# Altium PCB ESC_Tester_PCB.PcbDoc
Units mm, origin at the board's own origin, x right, y up, seen from the top; angles counter-clockwise.
Board outline 84.58 x 60.2 mm, 2 copper layers (Top Layer, Bottom Layer); 38 components, 41 nets, 162 pads, 0 vias.
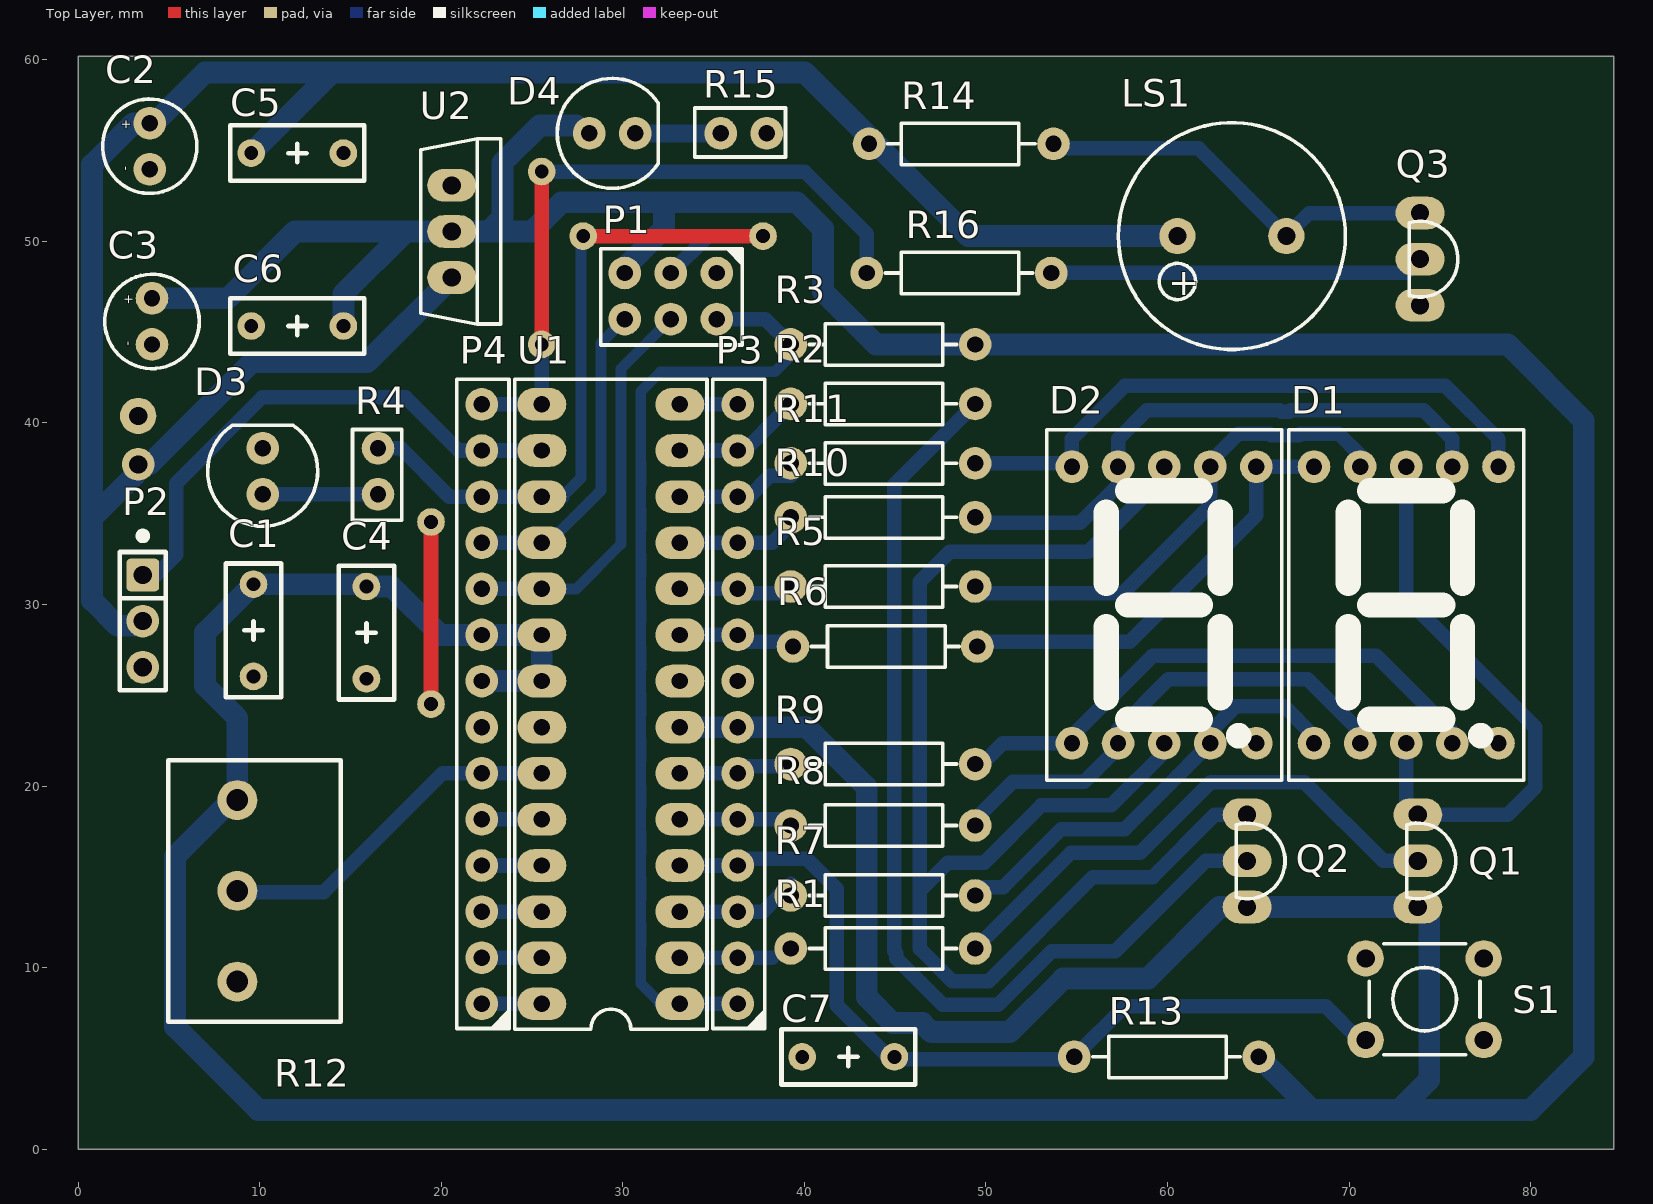
[diagram p0: Top Layer view]
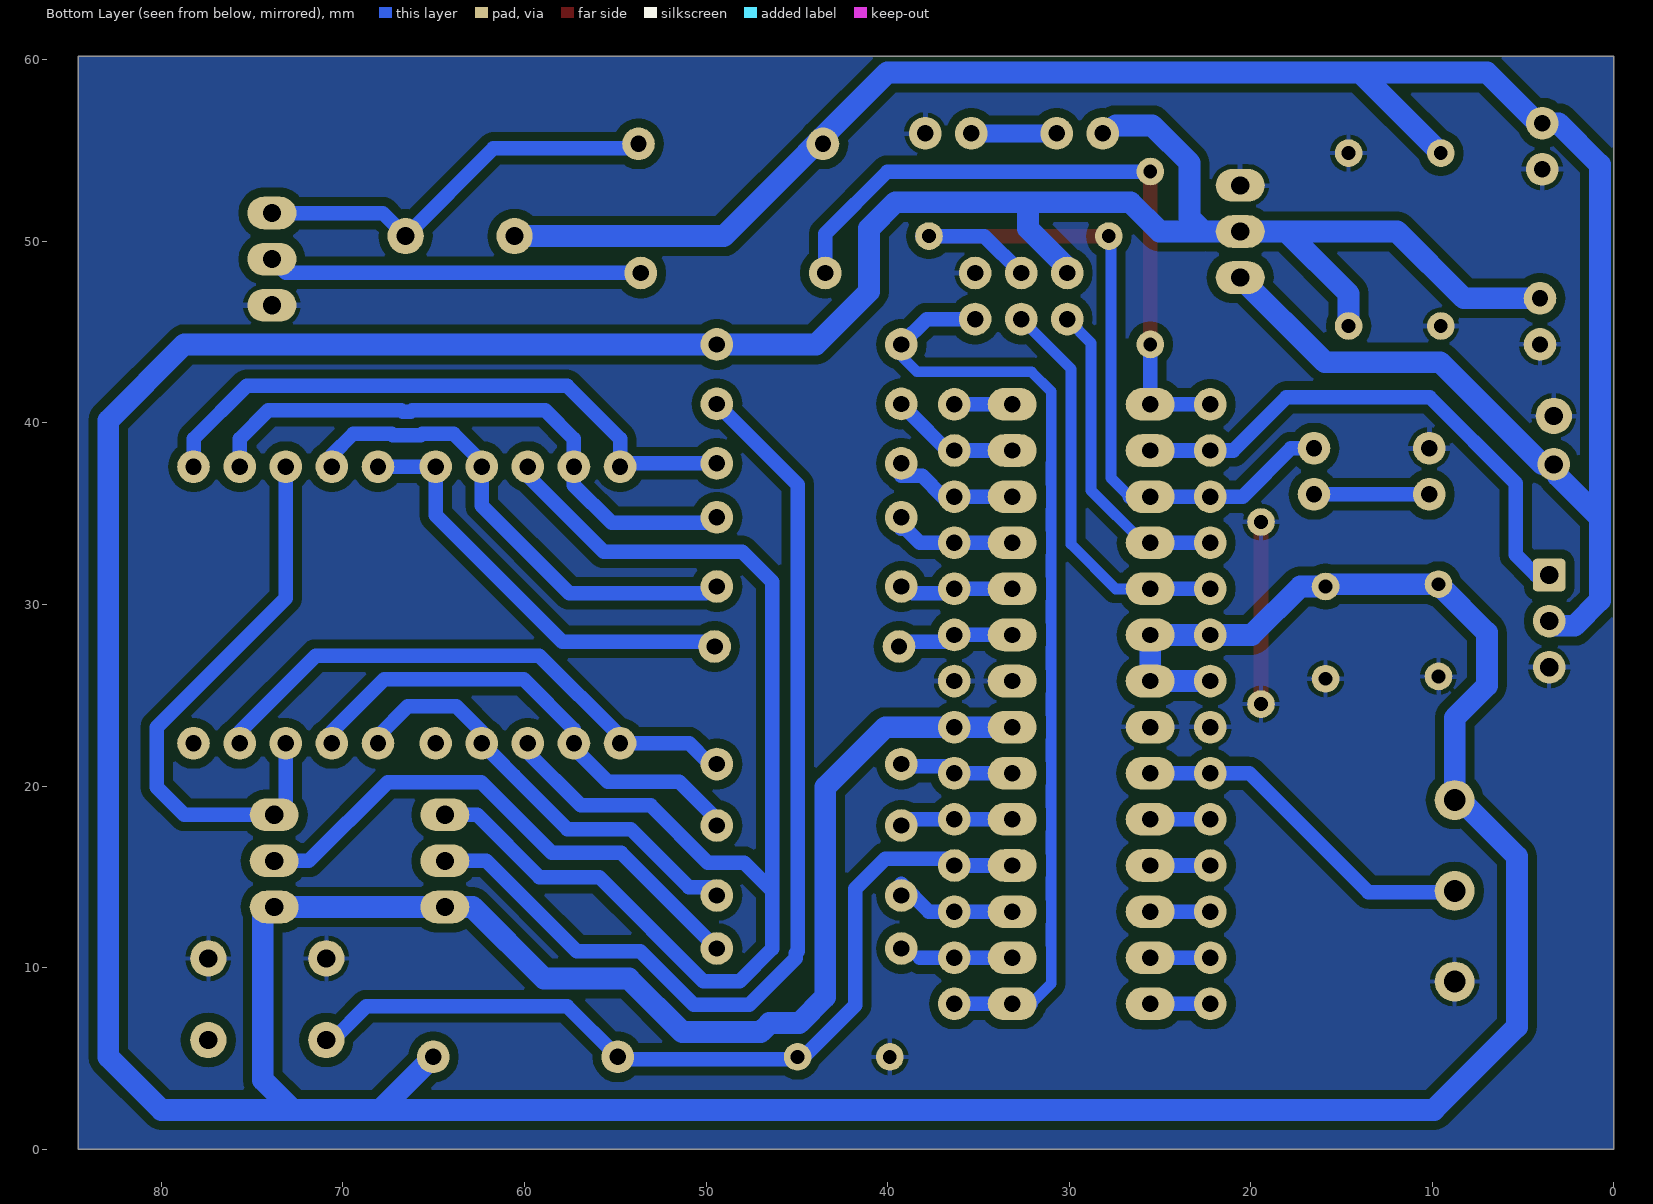
[diagram p1: Bottom Layer view, seen from below]

## Layer stack, top to bottom
Top Solder: solder mask 0.0102, Solder Resist, Dk 3.5
Top Layer: signal copper 0.0356
Dielectric 1: dielectric 0.32, FR-4, Dk 4.8
Bottom Layer: signal copper 0.0356
Bottom Solder: solder mask 0.0102, Solder Resist, Dk 3.5

## Board outline
0,0 84.582,0 84.582,60.198 0,60.198

## Design rules (kind name [scope] priority, off if disabled: settings)
Clearance [All] p1: gap=0.5 ignorepadtopadclearanceinfootprint=FALSE except(0: Arc-Text Arc-Hole Track-Text Track-Hole SMDPad-Text SMDPad-Hole THPad-Text THPad-Hole Via-Text Via-Hole Fill-Text Fill-Hole Poly-Text Poly-Hole Region-Text Region-Hole Text-Text Text-Hole)
ComponentClearance [All] p1: gap=0.3 collisioncheckmode=3 verticalgap=0.254 showdistances=FALSE
HoleSize [All] p1: absolutevalues=TRUE maxlimit=0.9 minlimit=0.9 maxpercent=80.000 minpercent=20.000
HoleToHoleClearance [All] p1: gap=0.1 allowstackedmicrovias=TRUE
MinimumSolderMaskSliver [All] p1: minsoldermaskwidth=0.05
PolygonConnect [All] p1: connectstyle=Relief reliefconductorwidth=0.254 reliefentries=4 polygonreliefangle="90 Angle" airgapwidth=0.254
RoutingVias [All] p1: holewidth=0.9 width=2 viastyle="Through Hole" minholewidth=0.9 minwidth=2 maxholewidth=0.9 maxwidth=2
SilkToSilkClearance [All] p1: silktosilkclearance=0
SilkToSolderMaskClearance [IsPad] p1: minsilkscreentomaskgap=0 clearancetoexposedcopper=TRUE
SolderMaskExpansion [All] p1: expansion=0.102
Width [All] p1: maxlimit=1.2 minlimit=0.5 preferedwidth=0.7 minimp=50.000000 maximp=50.000000 favimp=50.000000
24 further rules are at their usual default settings.

## Classes and differential pairs
net class DISP[6..0]: DISP0 DISP1 DISP2 DISP3 DISP4 DISP5 DISP6

## Components (designator, comment, footprint, x,y, rotation, side; value= is the part's Value field where it differs from the comment)
C1 "Cap Film 0.1uF" "Cap Film 0.1uF" 9.652,28.575 r270 top
C2 "10uF" "CAP RAD 10UF 35V" 3.937,55.241 r270 top
C3 "10uF" "CAP RAD 10UF 35V" 4.064,45.593 r270 top
C4 "Cap Film 0.1uF" "Cap Film 0.1uF" 15.875,28.448 r270 top
C5 "Cap Film 0.1uF" "Cap Film 0.1uF" 12.065,54.864 r0 top
C6 "Cap Film 0.1uF" "Cap Film 0.1uF" 12.065,45.339 r180 top
C7 "Cap Film 0.1uF" "Cap Film 0.1uF" 42.418,5.08 r180 top
D1 "7SEG RED CA 13MM" "7SEG RED PTH" 73.152,29.972 r0 top
D2 "7SEG RED CA 13MM" "7SEG RED PTH" 59.817,29.972 r0 top
D3 "LED 5MM RED" "LED 5MM RED" 10.16,37.338 r90 top
D4 "LED 5MM RED" "LED 5MM RED" 29.417,55.951 r0 top
LS1 "Buzzer" "BUZZER 12x6MM" 63.548,50.292 r0 top
P1 "87758-4016" "HDR MALE 2x3" 32.639,46.99 r180 top
P2 "920-0018-01" "HDR MALE 1x3" 3.556,31.623 r270 top
P3 "Header Female 1x14" "HDR FEMALE 1x14" 36.322,24.511 r90 top
P4 "Header Female 1x14" "HDR FEMALE 1x14" 22.225,24.511 r90 top
Q1 "BC327" TO92 73.787,15.875 r270 top
Q2 "BC327" TO92 64.389,15.875 r270 top
Q3 "BC549" TO92 73.914,49.022 r270 top
R1 "RES 1K 1/4W CARBON FILM" "RES 1K 1/4W CARBON FILM" 44.323,11.049 r0 top
R2 "RES 1K 1/4W CARBON FILM" "RES 1K 1/4W CARBON FILM" 44.323,41.046 r0 top
R3 "RES 10K 1/4W CARBON FILM" "RES 10K 1/4W CARBON FILM" 44.323,44.323 r0 top
R4 "RES 470R 1/4W CARBON FILM" "RES 470R 1/4W CARBON FILM_STAND" 16.51,37.338 r90 top
R5 "RES 470R 1/4W CARBON FILM" "RES 470R 1/4W CARBON FILM" 44.323,30.988 r0 top
R6 "RES 470R 1/4W CARBON FILM" "RES 470R 1/4W CARBON FILM" 44.45,27.686 r0 top
R7 "RES 470R 1/4W CARBON FILM" "RES 470R 1/4W CARBON FILM" 44.323,13.97 r0 top
R8 "RES 470R 1/4W CARBON FILM" "RES 470R 1/4W CARBON FILM" 44.323,17.822 r0 top
R9 "RES 470R 1/4W CARBON FILM" "RES 470R 1/4W CARBON FILM" 44.323,21.209 r0 top
R10 "RES 470R 1/4W CARBON FILM" "RES 470R 1/4W CARBON FILM" 44.323,34.798 r0 top
R11 "RES 470R 1/4W CARBON FILM" "RES 470R 1/4W CARBON FILM" 44.323,37.77 r0 top
R12 "Pot 10k" "Pot 10k" 8.763,14.224 r90 top
R13 "RES 10K 1/4W CARBON FILM" "RES 10K 1/4W CARBON FILM" 59.944,5.08 r0 top
R14 "RES 1K 1/4W CARBON FILM" "RES 1K 1/4W CARBON FILM" 48.641,55.372 r180 top
R15 "RES 470R 1/4W CARBON FILM" "RES 470R 1/4W CARBON FILM_STAND" 36.656,55.951 r0 top
R16 "RES 2K2 1/4W CARBON FILM" "RES 2K2 1/4W CARBON FILM" 48.514,48.26 r0 top
S1 "SPST-NO" "TACT SWITCH 6X6X7MM" 74.168,8.255 r180 top
U1 "ATMEGA8L" DIP28 29.337,24.511 r90 top
U2 "LM1117IMP-3.3/NOPB" TO220AB 20.574,50.546 r270 top

## Footprints (in the part's own frame and the unit in brackets; to place one, negate y for a bottom-side part, rotate by r counter-clockwise, add the part's x,y. Pads: shape width x height; smd on the part's side, far side on the other; paste and mask are expansions set on the pad)
"7SEG RED PTH" [mm]
  round 1.8 hole 0.9: 1(-5.08,-7.62) 2(-2.54,-7.62) 3(0,-7.62) 4(2.54,-7.62) 5(5.08,-7.62) 6(5.08,7.62) 7(2.54,7.62) 8(0,7.62) 9(-2.54,7.62) 10(-5.08,7.62)
  silkscreen extent -6.48,-9.65 6.48,9.65, body extent -6.38,-9.52 6.32,9.53, height 8.2
"BUZZER 12x6MM" [mm] "BUZZER 12x6MM"
  round 2 hole 1: 1(-3,0) 2(3,0)
  silkscreen extent -6.25,-6.25 6.25,6.25, body extent -6,-6 6,6, height 6.33
"Cap Film 0.1uF" [mil] "Cap Film 0.1uF"
  round 60 hole 30: 1(100,0) 2(-100,0)
  silkscreen extent -145,-60 145,60, body extent -145,-60 144,115, height 236
"CAP RAD 10UF 35V" [mm]
  round 1.8 hole 0.9: 1(-1.27,0) 2(1.27,0)
  silkscreen extent -2.6,-2.6 2.6,2.6, body extent -2.5,-2.5 2.5,2.5, height 12.2
DIP28 [mm]
  oval 1.8x2.7 hole 0.9: 1(-16.51,-3.8) 2(-13.97,-3.8) 3(-11.43,-3.8) 4(-8.89,-3.8) 5(-6.35,-3.8) 6(-3.81,-3.8) 7(-1.27,-3.8) 8(1.27,-3.8) 9(3.81,-3.8) 10(6.35,-3.8) 11(8.89,-3.8) 12(11.43,-3.8) 13(13.97,-3.8) 14(16.51,-3.8) 15(16.51,3.8) 16(13.97,3.8) 17(11.43,3.8) 18(8.89,3.8) 19(6.35,3.8) 20(3.81,3.8) 21(1.27,3.8) 22(-1.27,3.8) 23(-3.81,3.8) 24(-6.35,3.8) 25(-8.89,3.8) 26(-11.43,3.8) 27(-13.97,3.8) 28(-16.51,3.8)
  silkscreen extent -17.9,-5.3 17.9,5.3, body extent -17.79,-5.1 17.77,5.06, height 8
"HDR FEMALE 1x14" [mm] "Connector; Header; 14 Position"
  round 1.8 hole 0.9: 1(-16.51,0) 2(-13.97,0) 3(-11.43,0) 4(-8.89,0) 5(-6.35,0) 6(-3.81,0) 7(-1.27,0) 8(1.27,0) 9(3.81,0) 10(6.35,0) 11(8.89,0) 12(11.43,0) 13(13.97,0) 14(16.51,0)
  silkscreen extent -17.87,-1.5 17.9,1.37, body extent -17.8,-1.3 17.76,1.24, height 8.5
"HDR MALE 1x3" [mm] "PinHeader 1x3 TH Pitch 2.54mm"
  rrect25% 1.8x1.8 hole 1: 1(0,0)
  round 1.8 hole 1: 2(2.54,0) 3(5.08,0)
  silkscreen extent -2.3,-1.27 6.35,1.27, body extent -1.27,-1.27 6.35,1.27, height 9.5
"HDR MALE 2x3" [mm] "Connector; Header; 6 Position"
  round 1.8 hole 0.9: 1(-2.54,-1.27) 2(-2.54,1.27) 3(0,-1.27) 4(0,1.27) 5(2.54,-1.27) 6(2.54,1.27)
  silkscreen extent -3.94,-2.6 3.86,2.7, body extent -3.81,-2.54 3.81,2.54, height 5.94
"LED 5MM RED" [mm]
  round 1.8 hole 0.9: 1(-1.27,0) 2(1.27,0)
  silkscreen extent -3.03,-3.03 2.54,3.03, body extent -2.98,-3.01 2.44,3.01, height 9.31
"Pot 10k" [mm]
  round 2.2 hole 1.2: 1(-5,0) 2(0,0) 3(5,0)
  silkscreen extent -7.2,-5.7 7.2,3.8, body extent -8.15,-5.55 8.19,23.49, height 21.17
"RES 1K 1/4W CARBON FILM" [mm]
  round 1.8 hole 0.9: 1(-5.08,0) 2(5.08,0)
  silkscreen extent -4.06,-1.14 4.06,1.14, body extent -5.47,-1.27 5.47,1.27, height 3.27
"RES 2K2 1/4W CARBON FILM" [mm]
  round 1.8 hole 0.9: 1(-5.08,0) 2(5.08,0)
  silkscreen extent -4.06,-1.14 4.06,1.14, body extent -5.47,-1.27 5.47,1.27, height 3.27
"RES 10K 1/4W CARBON FILM" [mm]
  round 1.8 hole 0.9: 1(-5.08,0) 2(5.08,0)
  silkscreen extent -4.06,-1.14 4.06,1.14, body extent -5.47,-1.27 5.47,1.27, height 3.27
"RES 470R 1/4W CARBON FILM" [mm]
  round 1.8 hole 0.9: 1(-5.08,0) 2(5.08,0)
  silkscreen extent -4.06,-1.14 4.06,1.14, body extent -5.47,-1.27 5.47,1.27, height 3.27
"RES 470R 1/4W CARBON FILM_STAND" [mm]
  round 1.8 hole 0.9: 1(-1.27,0) 2(1.27,0)
  silkscreen extent -2.7,-1.3 2.3,1.4, body extent -2.56,-1.2 1.56,1.34, height 7.82
"TACT SWITCH 6X6X7MM" [mm] "Tactile Switch 6x6x7mm"
  round 2 hole 1: 1(-3.25,2.25) 2(3.25,2.25) 3(-3.25,-2.25) 4(3.25,-2.25)
  silkscreen extent -3.05,-3.05 3.05,3.05, body extent -3.95,-3.1 3.95,3.1, height 7
TO92 [mm]
  oval 1.8x2.7 hole 1: 1(-2.54,0) 2(0,0) 3(2.54,0)
  silkscreen extent -2.09,-0.6 2.09,2.08, body extent -2.74,-0.57 2.74,2.04, height 6.83
TO220AB [mm]
  oval 1.8x2.7 hole 1: 1(2.54,0) 2(-2.54,0) 3(0,0)
  silkscreen extent -5.1,-1.7 5.1,2.7, body extent -5.15,-1.78 5.15,2.73, height 19.34

## Part data
C1 C4 C5 C6 C7: library part "Cap Film 0.1uF - B32529C104K", "Cap Film 0.1uF 63V PET 10% (7.2 X 2.5 X 6.5mm) Radial 5mm 125C Bulk", Capacitance=100nF, Case/Package=Radial, Dielectric=PET, Insulation Resistance=15GR, Manufacturer="TDK EPCOS", Manufacturer Part Number=B32529C104K, Max Operating Temperature=125°C, Min Operating Temperature=-55°C, Package Quantity=2000, Supplier Part Number 1=21C0469, Tolerance=10%, Voltage Rating=63V, Voltage Rating (AC)=40V, ComponentLink1Description=http://www.farnell.com/datasheets/8708.pdf?src-supplier=Element14, ComponentLink1URL=http://www.farnell.com/datasheets/8708.pdf?src-supplier=Element14, ComponentLink2Description=https://www.distrelec.biz/Web/Downloads/_t/ds/b3252x_eng_tds.pdf?mime=application%2Fpdf&src-supplier=Distrelec, ComponentLink2URL=https://www.distrelec.biz/Web/Downloads/_t/ds/b3252x_eng_tds.pdf?mime=application%2Fpdf&src-supplier=Distrelec, ComponentLink3Description=http://www.farnell.com/datasheets/1955213.pdf?src-supplier=Farnell, ComponentLink3URL=http://www.farnell.com/datasheets/1955213.pdf?src-supplier=Farnell, ComponentLink4Description=https://www.verical.com/server-webapp/html/getDatasheet?partID=117180&src-supplier=Verical, ComponentLink4URL=https://www.verical.com/server-webapp/html/getDatasheet?partID=117180&src-supplier=Verical, ComponentLink5Description=https://produktinfo.conrad.com/datenblaetter/500000-524999/500871-da-01-en-METALLPOLYESTER_KONDENSATOR_0_10_UF.pdf?src-supplier=Conrad, ComponentLink5URL=https://produktinfo.conrad.com/datenblaetter/500000-524999/500871-da-01-en-METALLPOLYESTER_KONDENSATOR_0_10_UF.pdf?src-supplier=Conrad, Contact Plating=Matte,Tin, Depth=2.5mm, Dielectric Material=PET, Height=6.5mm, Height - Seated (Max)=0.256inch, Lead Diameter=0.5mm, Lead Free="Lead Free", Lead Length=6mm, Lead Pitch=5mm, Length=7.2mm, Life (Hours)=200000Hour, Material=PVC,Resin, Mount="PCB,Through Hole", Number of Pins=2, Packaging=Bulk, Pitch=5mm, Radiation Hardening=No, REACH SVHC="No SVHC", Stock 1=0, Supplier 1=Newark, Termination=Radial, Voltage Rating (DC)=63V, Width=2.5mm
C2 C3: library part "CAP ELE RAD 10uF 16V", "CAP ELE RAD 10uF 16V", Capacitance Tolerance="± 20%", Capacitor Terminals="Radial Leaded", Leakage Current=6, Lifetime @ Temperature="2000 hours @ 85", Manufacturer=-, Manufacturer Part Number=IMP1295, Operating Temperature Max=85, Operating Temperature Min=-40, Operating Temperature Range="-40°C to +85°C<!--FANDB--><div class=\"features-and-benefits-container\"><div class=\"features-and-benefits-description\"><span class=\"features-benefits-value\">The Multicomp MCGPR series capacitors are general purpose, radial leaded polarized aluminium electrolytic capacitors. MCGPR series parts cover broad range of voltage ratings and capacitance values.</span></div><div class=\"features-and-benefits-list\"><ul class=\"features-and-benefits-list-list\"><li class=\"features-and-benefits-list-item\">Capacitance value ranges from 0.1µF to 22000µF for 6.3VDC to 100VDC</li><li class=\"features-and-benefits-list-item\">Capacitance value ranges from 0.47µF to 820µF for 160VDC to 450VDC</li><li class=\"features-and-benefits-list-item\">Tolerance of ±20%</li><li class=\"features-and-benefits-list-item\">Endurance of 2000h at 85°C</li><li class=\"features-and-benefits-list-item\">Available in -40°C to 85°C and -25°C to 85", Supplier Part Number 1="Capacitor Eletrolítico 10uF/16V", Voltage Rating=16, Capacitance=10uF, Capacitance Tolerance ±="± 20%", ComponentLink1Description=http://loja.multcomercial.com.br/capacitor-eletrolitico-10uf-16v.html, ComponentLink1URL=http://loja.multcomercial.com.br/capacitor-eletrolitico-10uf-16v.html, Diameter=5, ESR=-, Height=11, Lead Spacing=2, Packaging=Each, Pricing 1="1=0.50 (BRL)", Product Range="MCGPR Series", RoHS=YES, Stock 1=33826, Supplier 1="Mult Comercial", SVHC="No SVHC (15-Jun-2015)"
D1 D2: "PHOTONIC - PHDE113A - DISPLAY, SEVEN SEGMENT, 13MM, RED", Colour=Red, Forward Current If=30mA, Forward Voltage=2.1, Manufacturer=Photonic, Manufacturer Part Number=PHDE113A, Supplier Part Number 1="Display de 7 Segmentos Anodo Comum Vermelho Alta Intensidade PHDE113A - Politronic", Character Size=13, Common Connection="Common Anode", ComponentLink1Description=http://loja.multcomercial.com.br/display-de-7-segmentos-anodo-comum-vermelho-alta-intensidade-phde113a-politronic.html, ComponentLink1URL=http://loja.multcomercial.com.br/display-de-7-segmentos-anodo-comum-vermelho-alta-intensidade-phde113a-politronic.html, ComponentLink2Description=http://www.politronic.com.br/especs/dis/PHDX113.pdf, ComponentLink2URL=http://www.politronic.com.br/especs/dis/PHDX113.pdf, LED Color=Red, Luminous Intensity="1800 ucd", No. of Digits / Alpha=1, Packaging=Each, Pricing 1="1=3.70 (BRL)", RoHS=YES, Stock 1=0, Supplier 1="Mult Comercial"
D3 D4: Current If Luminous Intensity=2, Forward Current If=20, Forward Voltage VF Max=2.5, LED Colour=Red, Manufacturer=Paralight, Manufacturer Part Number=IMP585, Operating Temperature Max=85, Operating Temperature Min=-40, Operating Temperature Range="-40°C to +85", Peak Forward Current=7, Supplier Part Number 1="Led 3mm Vermelho Difuso L-314HD - Paralight", Voltage Vf Typ="2.2V<!--FANDB--><div class=\"features-and-benefits-container\"><div class=\"features-and-benefits-description\"><span class=\"features-benefits-value\">The L-934LID from Kingbright is a through hole round shape high efficiency red colour LED. The device is made of gallium arsenide phosphide on gallium phosphide orange light emitting diode. This LED is widely used because of low power consumption, long life and solid state reliability.</span></div><div class=\"features-and-benefits-list\"><ul class=\"features-and-benefits-list-list\"><li class=\"features-and-benefits-list-item\">Standard bulb size of T-1 (3mm)</li><li class=\"features-and-benefits-list-item\">Reliable and rugged</li><li class=\"features-and-benefits-list-item\">Viewing angle is 60°</li><li class=\"features-and-benefits-list-item\">Luminous intensity of 3mcd at 2mA</li><li class=\"features-and-benefits-list-item\">Forward voltage is 2.0V</li><li class=\"features-and-benefits-list-item\">Forward current (If) is 20mA</li><li class=\"features-and-benefits-list-item\">Dominant wavelength is 625nm at IF=20mA</li><li class=\"features-and-benefits-list-item\">Peak wavelength is 627nm at IF=20", Bulb Size=3mm, ComponentLink1Description=http://loja.multcomercial.com.br/led-3mm-vermelho-difuso-l-314hd-paralight.html, ComponentLink1URL=http://loja.multcomercial.com.br/led-3mm-vermelho-difuso-l-314hd-paralight.html, Dominant Wavelength=625, External Diameter=2.9, External Length / Height=4.6, Forward Current If Max=20, Forward Voltage=2, Lead Cross-section Depth=0.5, Lead Cross-section Width=0.5, Lead Spacing=2.54, LED / Lamp Size="3mm / T-1", LED Mounting="Through Hole", LED Type=Standard, Lens Shape=Round, Luminous Intensity=3, Luminous Intensity @ If Min=0.7, Luminous Intensity Typ=3, Mounting Type="PCB Through Hole", MSL=-, No. of Pins=2, Packaging=Each, Peak Wavelength=625, PIV Max=5, Pricing 1="1=0.15 (BRL)", RoHS=YES, Stock 1=35260, Supplier 1="Mult Comercial", SVHC="No SVHC (15-Jun-2015)", Viewing Angle=60°, Wavelength Typ=625
LS1: library part "AUDIO PIEZO TRANSDUCER 30V TH", "AUDIO PIEZO TRANSDUCER 30V TH", Current - Supply=-, Frequency=4kHz, Manufacturer="TDK Corporation", Manufacturer Part Number=PS1240P02BT, Operating Mode="Single Tone", Operating Temperature="-10°C ~ 70°C", Supplier Part Number 1=445-2525-1-ND, Voltage - Rated=3V, Voltage Range="30V (Max)", Approvals=-, Category="Audio Products", ComponentLink1Description=https://product.tdk.com/info/en/catalog/datasheets/ef532_ps.pdf, ComponentLink1URL=https://product.tdk.com/info/en/catalog/datasheets/ef532_ps.pdf, Driver Circuitry="Transducer, Externally Driven", Duration=-, Height - Seated (Max)="0.307\" (7.80mm)", Input Type="Zero-Peak Signal", Mounting Type="Through Hole", Packaging="Cut Tape (CT)", Part Status=Active, Port Location=Top, Pricing 1="1=0.72, 10=0.622, 100=0.3889, 250=0.37776 (USD)", Ratings=-, RoHS="RoHS Compliant", Size / Dimension="0.480\" Dia (12.20mm)", Sound Pressure Level="60dB @ 3V, 10cm", Stock 1=23730, Supplier 1=Digi-Key, Technology=Piezo, Termination="PC Pins"
P1: "Headers & Wire Housings VERT HEADER 40P Lead Free", Current Rating="2 A", Manufacturer=Molex, Supplier Part Number 1=538-87758-4016, Voltage Rating="125 V", Accessory Type=-, Brand=Molex, Category="Headers & Wire Housings", ComponentLink1Description=http://www.mouser.com/ds/2/276/0877584016_PCB_HEADERS-176369.pdf, ComponentLink1URL=http://www.mouser.com/ds/2/276/0877584016_PCB_HEADERS-176369.pdf, Contact Gender="Pin (Male)", Contact Material="Phosphor Bronze", Contact Plating=Gold, Contact Type=-, Housing Material=Nylon, Manufacturer Part Number=87758-4016, Minimum Order Quantity=1, Mounting Angle=Vertical, Mounting Style="Through Hole", Number of Positions="40 Position", Number of Rows="2 Row", Packaging=Tray, Pitch="2 mm", Pricing 1="1=3.82, 10=2.96, 100=2.51, 500=2.29, 1000=2.08, 2000=1.98, 5000=1.87 (AUD)", Product=Headers, Product Category="2mm Connectors", Reeling=False, RoHS="RoHS Compliant", RoHS - Mouser=Y, Row Spacing="2 mm", Series=87758, Standard Pack Qty=900, Stock 1=704, Supplier 1=Mouser, Termination Style="Through Hole", Tradename=Milli-Grid, Type=Breakaway
P2: library part 920-0018-01_1, "Headers & Wire Housings 40Pin 2mm Spacing Single Row Hdrs, 5pc", Manufacturer=SchmartBoard, Supplier Part Number 1=872-920-0018-01, Accessory Type=-, Brand=SchmartBoard, Category="Headers & Wire Housings", ComponentLink1Description=http://www.mouser.com/ds/2/356/SchmartBoard_920-0018-01-305856.pdf, ComponentLink1URL=http://www.mouser.com/ds/2/356/SchmartBoard_920-0018-01-305856.pdf, Contact Gender="Pin (Male)", Contact Plating=Gold, Contact Type=-, Manufacturer Part Number=920-0018-01, Minimum Order Quantity=1, Mounting Angle=Vertical, Mounting Style="Straight Pin", Number of Positions="40 Position", Number of Rows="1 Row", Pitch="2 mm", Pricing 1="1=7.43, 5=7.05 (AUD)", Product=Headers, Product Category=Accessories, Reeling=False, RoHS="RoHS Compliant", RoHS - Mouser=Y, Row Spacing=-, Stock 1=14, Supplier 1=Mouser, Termination Style="Through Hole", Type=Breakaway
P3 P4: "Headers & Wire Housings 40Pin 2mm Spacing Single Row Hdrs, 5pc", Manufacturer=Cromax, Manufacturer Part Number=-, Accessory Type=-, Brand=Cromax, Category="Headers & Wire Housings", ComponentLink1Description=-, ComponentLink1URL=-, Contact Gender="Pin (Female)", Contact Plating=Gold, Contact Type=-, Minimum Order Quantity=1, Mounting Angle=Vertical, Mounting Style="Straight Pin", Number of Positions="40 Position", Number of Rows="1 Row", Pitch="2 mm", Pricing 1="1=1.60, 2=0.80 (BRL)", Product=Headers, Product Category=Accessories, Reeling=False, RoHS="RoHS Compliant", RoHS - Mouser=Y, Row Spacing=-, Stock 1=14, Supplier 1=-, Supplier Part Number 1=-, Termination Style="Through Hole", Type=Breakaway
Q1 Q2: library part "BC327 BJT PNP TO92", "Bipolar Transistors - BJT PNP -45V -800mA HFE/630", Collector- Base Voltage VCBO="- 50 V", Collector-Emitter Saturation Voltage="- 0.7 V", Collector- Emitter Voltage VCEO Max="- 45 V", DC Current Gain hFE Max=630, Emitter- Base Voltage VEBO="- 5 V", Manufacturer="Fairchild Semiconductor", Maximum DC Collector Current="0.8 A", Maximum Operating Temperature="+ 150 C", Minimum Operating Temperature="- 55 C", Package / Case=TO-92, Pd - Power Dissipation="625 mW", Supplier Part Number 1="Transistor BC327-25 PNP TO-92 - Cód. Loja 14 - FAIRCHILD", Brand="Fairchild Semiconductor", Category="Bipolar Transistors - BJT", ComponentLink1Description=http://loja.multcomercial.com.br/transistor-bc237-25-pnp-to-92-cod-loja-14-fairchild.html, ComponentLink1URL=http://loja.multcomercial.com.br/transistor-bc237-25-pnp-to-92-cod-loja-14-fairchild.html, Configuration=Single, DC Collector/Base Gain hfe Min=100, Gain Bandwidth Product fT="100 MHz", Manufacturer Part Number=BC327, Minimum Order Quantity=1, Mounting Style="Through Hole", Packaging=Bulk, Pricing 1="1=0.20 (BRL)", Product Status=Obsolete, Reeling=False, RoHS="RoHS Compliant", RoHS - Mouser=Y, Series=BC327, Standard Pack Qty=2000, Stock 1=0, Supplier 1="Mult Comercial", Transistor Polarity=PNP
Q3: "TRANS NPN 30V 0.1A TO-92", Collector- Base Voltage VCBO="30 V", Collector-Emitter Saturation Voltage="200 mV", DC Current Gain hFE Max=800, Emitter- Base Voltage VEBO="5 V", Manufacturer="Fairchild Semiconductor", Maximum DC Collector Current="0.1 A", Maximum Operating Temperature="+ 150 C", Maximum Power Dissipation="0.5 W", Minimum Operating Temperature="- 65 C", Package / Case=TO-92-3, Supplier Part Number 1=512-BC549, Brand="Fairchild Semiconductor", Collector- Emitter Voltage VCEO Max="30 V", ComponentLink1Description=https://datasheet.ciiva.com/982/bc546-982130.pdf, ComponentLink1URL=https://datasheet.ciiva.com/982/bc546-982130.pdf, ComponentLink2Description=https://datasheet.ciiva.com/17179/bc549-17179663.pdf, ComponentLink2URL=https://datasheet.ciiva.com/17179/bc549-17179663.pdf, Configuration=Single, DC Collector/Base Gain hfe Min=110, Factory Pack Quantity=2000, Gain Bandwidth Product fT="300 MHz", Manufacturer Part Number=BC549, Mounting Style="Through Hole", Packaging=Bulk, Product Category="Bipolar Transistors - BJT", RoHS=Details, Series=BC549, Supplier 1=Mouser, Transistor Polarity=NPN
R1 R2 R14: "RES 1K OHM 1/4W 5% CARBON FILM", Manufacturer=Ty-Ohm, Manufacturer Part Number=CR25, Operating Temperature="-55°C ~ 155°C", Package / Case=Axial, Power (Watts)="0.25W, 1/4W", Resistance (Ohms)=1K, Supplier Part Number 1="Resistor de Filme de Carbono 1/4 de Watt CR25 5% de tolerância - 0.22R O à 10M O", Temperature Coefficient="0/ -500ppm/°C", Tolerance=±5%, Category=Resistors, ComponentLink1Description=http://loja.multcomercial.com.br/resistor-de-1-4-de-watt-cr25-5-de-tolerancia.html, ComponentLink1URL=http://loja.multcomercial.com.br/resistor-de-1-4-de-watt-cr25-5-de-tolerancia.html, Composition="Carbon Film", Features="Flame Retardant Coating, Safety", Height=-, Number of Terminations=2, Packaging="Cut Tape (CT)", Pricing 1="1=0.20 (BRL)", RoHS="RoHS Compliant", Size / Dimension="0.091\" Dia x 0.256\" L (2.30mm x 6.50mm)", Stock 1=617543, Supplier 1="Mult Comercial", Supplier Device Package=Axial
R3 R13: "RES 10K OHM 1/4W 5% CARBON FILM", Manufacturer=Ty-Ohm, Manufacturer Part Number=CR25, Operating Temperature="-55°C ~ 155°C", Package / Case=Axial, Power (Watts)="0.25W, 1/4W", Resistance (Ohms)=10K, Supplier Part Number 1="Resistor de Filme de Carbono 1/4 de Watt CR25 5% de tolerância - 0.22R O à 10M O", Temperature Coefficient="0/ -500ppm/°C", Tolerance=±5%, Category=Resistors, ComponentLink1Description=http://loja.multcomercial.com.br/resistor-de-1-4-de-watt-cr25-5-de-tolerancia.html, ComponentLink1URL=http://loja.multcomercial.com.br/resistor-de-1-4-de-watt-cr25-5-de-tolerancia.html, Composition="Carbon Film", Features="Flame Retardant Coating, Safety", Height=-, Number of Terminations=2, Packaging="Cut Tape (CT)", Pricing 1="1=0.20 (BRL)", RoHS="RoHS Compliant", Size / Dimension="0.091\" Dia x 0.256\" L (2.30mm x 6.50mm)", Stock 1=617543, Supplier 1="Mult Comercial", Supplier Device Package=Axial
R4 R5 R6 R7 R8 R9 R10 R11 R15: "RES 470R OHM 1/4W 5% CARBON FILM", Manufacturer=Ty-Ohm, Manufacturer Part Number=CR25, Operating Temperature="-55°C ~ 155°C", Package / Case=Axial, Power (Watts)="0.25W, 1/4W", Resistance (Ohms)=470R, Supplier Part Number 1="Resistor de Filme de Carbono 1/4 de Watt CR25 5% de tolerância - 0.22R O à 10M O", Temperature Coefficient="0/ -500ppm/°C", Tolerance=±5%, Category=Resistors, ComponentLink1Description=http://loja.multcomercial.com.br/resistor-de-1-4-de-watt-cr25-5-de-tolerancia.html, ComponentLink1URL=http://loja.multcomercial.com.br/resistor-de-1-4-de-watt-cr25-5-de-tolerancia.html, Composition="Carbon Film", Features="Flame Retardant Coating, Safety", Height=-, Number of Terminations=2, Packaging="Cut Tape (CT)", Pricing 1="1=0.20 (BRL)", RoHS="RoHS Compliant", Size / Dimension="0.091\" Dia x 0.256\" L (2.30mm x 6.50mm)", Stock 1=617543, Supplier 1="Mult Comercial", Supplier Device Package=Axial
R12: "POT 10K OHM 1/20W PLASTIC LINEAR", Manufacturer="TT Electronics/BI", Manufacturer Part Number=P120PK-Y25BR10K, Power (Watts)="0.05W, 1/20W", Resistance (Ohms)=10k, Resistive Material="Conductive Plastic", Supplier Part Number 1=987-1710-ND, Temperature Coefficient=-, Tolerance=±20%, Actuator Diameter="0.236\" (6.00mm)", Actuator Length="0.984\" (25.00mm)", Actuator Type=Knurled, Adjustment Type="Top Adjustment", Built in Switch=None, Bushing Thread=-, Category="Potentiometers, Variable Resistors", ComponentLink1Description=http://www.ttelectronics.com/sites/default/files/download-files/Datasheet_RotaryPanelPot_P120series.pdf, ComponentLink1URL=http://www.ttelectronics.com/sites/default/files/download-files/Datasheet_RotaryPanelPot_P120series.pdf, Mounting Type="Through Hole, Snap In", Number of Turns=1, Packaging=Tray, Part Status=Active, Pricing 1="1=0.6, 10=0.553, 25=0.4932, 50=0.476, 100=0.442, 250=0.43352, 500=0.3995, 1000=0.34, 5000=0.2805 (USD)", RoHS="RoHS Compliant", Rotation=300°, Stock 1=1210, Supplier 1=Digi-Key, Taper=Linear, Termination Style="PC Pins, Board Locks"
R16: "RES 2K2 OHM 1/4W 5% CARBON FILM", Manufacturer=Ty-Ohm, Manufacturer Part Number=CR25, Operating Temperature="-55°C ~ 155°C", Package / Case=Axial, Power (Watts)="0.25W, 1/4W", Resistance (Ohms)=2K2, Supplier Part Number 1="Resistor de Filme de Carbono 1/4 de Watt CR25 5% de tolerância - 0.22R O à 10M O", Temperature Coefficient="0/ -500ppm/°C", Tolerance=±5%, Category=Resistors, ComponentLink1Description=http://loja.multcomercial.com.br/resistor-de-1-4-de-watt-cr25-5-de-tolerancia.html, ComponentLink1URL=http://loja.multcomercial.com.br/resistor-de-1-4-de-watt-cr25-5-de-tolerancia.html, Composition="Carbon Film", Features="Flame Retardant Coating, Safety", Height=-, Number of Terminations=2, Packaging="Cut Tape (CT)", Pricing 1="1=0.20 (BRL)", RoHS="RoHS Compliant", Size / Dimension="0.091\" Dia x 0.256\" L (2.30mm x 6.50mm)", Stock 1=617543, Supplier 1="Mult Comercial", Supplier Device Package=Axial
S1: library part "SWITCH TACTILE SPST-NO 0.02A 15V", "SWITCH TACTILE SPST-NO 0.02A 15V", Contact Rating @ Voltage="0.02A @ 15VDC", Illumination Type, Color=-, Manufacturer="Panasonic Electronic Components", Manufacturer Part Number=EVQ-PAC07K, Operating Force=100gf, Operating Temperature="-20°C ~ 70°C", Supplier Part Number 1=P8011S-ND, Actuator Height off PCB, from Pins=7.00mm, Actuator Material=-, Actuator Orientation="Top Actuated", Actuator Type=Standard, Category=Switches, Circuit=SPST-NO, ComponentLink1Description=http://industrial.panasonic.com/cdbs/www-data/pdf/ATK0000/ATK0000CE10.pdf, ComponentLink1URL=http://industrial.panasonic.com/cdbs/www-data/pdf/ATK0000/ATK0000CE10.pdf, Features=-, Illumination=Non-Illuminated, Illumination Voltage (Nominal)=-, Ingress Protection=-, Mechanical Life="100,000 Cycles", Mounting Type="Through Hole", Outline="6.00mm x 6.00mm", Packaging=Bulk, Part Status=Active, Pricing 1="1=0.27, 10=0.254, 25=0.2168, 50=0.1896, 100=0.176, 250=0.15572, 500=0.14894, 1000=0.12186, 5000=0.10832 (USD)", RoHS="RoHS Compliant", Stock 1=19805, Supplier 1=Digi-Key, Switch Function=Off-Mom, Switch Travel=0.25mm, Termination Style="PC Pin"
U1: library part "MCU ATMEGA8L-8PU PDIP28_1", "8-bit Microcontrollers - MCU 8kB Flash 0.5kB EEPROM 23 I/O Pins", Manufacturer=Atmel, Manufacturer Part Number=ATmega8L-8PU, Maximum Clock Frequency="8 MHz", Maximum Operating Temperature="+ 85 C", Minimum Operating Temperature="- 40 C", Operating Supply Voltage="2.7 V to 5.5 V", Package / Case=DIP-28, Supplier Part Number 1="Microcontrolador ATMEGA8L-8PU DIP28 - Cód. Loja 472- Atmel", Supply Voltage - Max="5.5 V", Supply Voltage - Min="2.7 V", Brand=Atmel, Category="8-bit Microcontrollers - MCU", ComponentLink1Description=http://loja.multcomercial.com.br/microcontrolador-atmega88pa-pu-dip28-cod-loja-748-atmel-2.html, ComponentLink1URL=http://loja.multcomercial.com.br/microcontrolador-atmega88pa-pu-dip28-cod-loja-748-atmel-2.html, ComponentLink2Description=http://loja.multcomercial.com.br/soquete-estampado-slim-mac28-28-pinos-cod-loja-2260-e-2261.html, ComponentLink2URL=http://loja.multcomercial.com.br/soquete-estampado-slim-mac28-28-pinos-cod-loja-2260-e-2261.html, Core=AVR, Data Bus Width="8 bit", Data RAM Size="1 kB", Data RAM Type=SRAM, Data ROM Size="512 B", Data ROM Type=EEPROM, Interface Type="SPI, TWI, USART", Minimum Order Quantity=1, Mounting Style=SMD/SMT, Number of I/Os="23 I/O", Number of Timers/Counters="3 Timer", Packaging=Tray, Pricing 1="1=8.70 (BRL)", Processor Series=megaAVR, Product=MCU, Product Category="Microcontrollers - RISC", Program Memory Size="8 kB", Program Memory Type=Flash, Reeling=False, RoHS="RoHS Compliant", Series="ATMEGA 8", Standard Pack Qty=1, Supplier 1="Mult Comercial", Supplier Part Number 2="Soquete estampado slim MAC28 28 pinos - Cód. Loja 2260 E 2261", Tradename=ATMEGA
U2: "TEXAS INSTRUMENTS   LM1117IMP-3.3/NOPB   LDO, 1.2VDO, 3.3V, 1%, 0.8A, 3SOT223", Junction to Case=15C/W(Typ), Manufacturer="Texas Instruments", Maximum Dropout Voltage @ Current=1.3V@100mA|1.35V@500mA|1.4V@800mA, Maximum Input Voltage=15V, Maximum Operating Temperature=125C, Maximum Output Current=1.5A, Maximum Quiescent Current=15mA, Minimum Operating Temperature=-40C, Output Voltage=3.3V, Supplier_Package=SOT-223, Supplier Part Number 1=926-LM1117IMP3.3NOPB, Typical Dropout Voltage @ Current=1.1V@100mA|1.15V@500mA|1.2V@800mA, Typical Quiescent Current=5mA, Accuracy=1%, ComponentLink1Description=http://www.jameco.com/Jameco/Products/ProdDS/1281318.pdf?src-supplier=Jameco, ComponentLink1URL=http://www.jameco.com/Jameco/Products/ProdDS/1281318.pdf?src-supplier=Jameco, ComponentLink2Description=http://www.farnell.com/datasheets/1670636.pdf?src-supplier=Element14, ComponentLink2URL=http://www.farnell.com/datasheets/1670636.pdf?src-supplier=Element14, ComponentLink3Description=http://www.ti.com/lit/ds/symlink/lm1117.pdf?src-supplier=Digi-Key, ComponentLink3URL=http://www.ti.com/lit/ds/symlink/lm1117.pdf?src-supplier=Digi-Key, ComponentLink4Description=http://www.farnell.com/datasheets/1882372.pdf?src-supplier=Element14, ComponentLink4URL=http://www.farnell.com/datasheets/1882372.pdf?src-supplier=Element14, ComponentLink5Description=http://www.easyflip.co.uk/Farnell_element14_2013_UK/book.html?page=615&src-supplier=Farnell, ComponentLink5URL=http://www.easyflip.co.uk/Farnell_element14_2013_UK/book.html?page=615&src-supplier=Farnell, ComponentLink6Description=http://www.ti.com/lit/ds/symlink/lm1117-n.pdf?src-supplier=Avnet, ComponentLink6URL=http://www.ti.com/lit/ds/symlink/lm1117-n.pdf?src-supplier=Avnet, ComponentLink7Description=https://www.distrelec.biz/Web/Downloads/_t/ds/lm1117_eng_tds.pdf?mime=application%2Fpdf&src-supplier=Distrelec, ComponentLink7URL=https://www.distrelec.biz/Web/Downloads/_t/ds/lm1117_eng_tds.pdf?mime=application%2Fpdf&src-supplier=Distrelec, Family=LM1117, Function=LDO, Junction to Ambient=136C/W(Typ), Line Regulation=1mV(Typ), Load Regulation=1mV(Typ), Manufacturer Part Number=LM1117IMP-3.3/NOPB, Mounting="Surface Mount", Number of Outputs=1, Output Type=Fixed, Packaging="Tape and Reel", Pin_Count=4, Polarity=Positive, Pricing 1="1=1.1, 10=0.94, 50=0.94, 100=0.719, 1000=0.501, 10000=0.428 (USD)", Product Height=1.6mm, Product Length=6.5mm, Product Type="Linear Regulator", Product Width=3.56mm, Stock 1=27688, Supplier 1=Mouser, Type=Linear

## Free pads (board coordinates)
  round 1.8 hole 1: 1(3.302,37.719)
  round 2 hole 1: 2(3.302,40.386)
  round 1.524 hole 0.762: 3(25.527,53.848) 3(27.813,50.292) 3(37.719,50.292) 5(25.527,44.323) 7(19.431,24.511) 7(19.431,34.544)

## Nets (pads, with @x,y where several pads share a name; then routed paths per layer and width w, separated by ;. In a path a pad name is that pad's centre, name@x,y a point inside that pad or via, vN(x,y) a via of type N, cw(c..) or ccw(c..) an arc to the next point about the centre after c; other vN are vias at no path point)
3V3: C1.2 C3.1 C4.2 C6.2 D4.1 P1.5 P3.7 P4.8 P4.9 Q1.3 Q2.3 R3.2 R12.3 R13.2 U1.7 U1.20 U1.21 U2.3 | length 348.3
  Bottom Layer w0.8: C4.2@15.748,31.115 C4.2 ; 22.352,50.546 22.606,50.546
  Bottom Layer w1.2: C3.1 8.255,46.863 11.938,50.546 18.034,50.546 ; C6.2 14.605,47.117 18.034,50.546 ; C4.2@15.748,31.115 C1.2 6.985,28.448 6.985,25.527 8.763,23.749 8.763,19.351 8.556,19.351 5.334,16.129 5.334,6.731 9.906,2.159 67.945,2.159 ; C4.2 17.272,30.988 19.939,28.321 P4.9 U1.20 U1.21 P4.8 ; 22.352,50.546 U2.3 18.034,50.546 ; D4.1@27.432,56.388 25.434,56.388 23.368,54.322 23.368,51.308 22.606,50.546 25.019,50.546 26.627,52.154 32.258,52.154 ; P1.5 30.099,48.548 32.258,50.707 32.258,52.154 ; U1.7 P3.7 40.132,23.241 43.434,19.939 43.434,8.382 44.874,6.942 46.502,6.942 46.995,6.449 51.308,6.449 54.25,9.39 58.92,9.39 62.865,13.335 Q2.3 Q1.3 74.422,12.7 74.422,3.81 72.834,2.222 ; R13.2 67.945,2.159 ; 32.258,52.154 39.578,52.154 41.021,50.711 41.021,47.244 43.942,44.323 R3.2 78.74,44.323 82.931,40.132 82.931,5.08 80.01,2.159 67.945,2.159
a: P3.10 R5.1 U1.10 | length 6.5
  Bottom Layer w0.8: U1.10 P3.10 36.576,30.607 38.608,30.607 R5.1@39.243,31.242
b: P3.9 R6.1 U1.9 | length 6.5
  Bottom Layer w0.8: U1.9 P3.9 36.322,27.94 R6.1@39.243,27.94
Buzzer: P4.14 pad.3@25.527,53.848 pad.5 R16.1 U1.15 | length 37.6
  Top Layer w0.8: pad.5@25.527,44.069 pad.5 pad.3@25.527,53.848
  Bottom Layer w0.8: P4.14 U1.15 25.527,41.031 pad.5@25.527,44.069 ; pad.3@25.527,53.848 40.005,53.848 43.434,50.419 R16.1
c: P3.3 R7.1 U1.3 | length 6.7
  Bottom Layer w0.8: U1.3 P3.3 37.719,13.081 R7.1@39.243,14.605
d: P3.5 R8.1 U1.5 | length 6.1
  Bottom Layer w0.8: U1.5 P3.5 R8.1@39.243,18.161
DISP0: D1.9 D2.7 R5.2 | length 27.7
  Bottom Layer w0.8: R5.2@49.403,31.217 50.013,30.607 57.531,30.607 62.357,35.433 D2.7 62.357,37.846 63.903,39.392 65.643,39.392 65.725,39.31 67.244,39.31 67.326,39.392 69.447,39.392 70.612,38.227 D1.9
DISP1: D1.10 D2.6 R6.2 | length 24.2
  Bottom Layer w0.8: R6.2@49.403,27.94 57.912,27.94 64.897,34.925 D2.6 D1.10
DISP2: D1.1 D2.4 R7.2 | length 24.2
  Bottom Layer w0.8: R7.2@49.403,14.436 50.951,14.436 54.146,17.63 57.635,17.63 60.557,20.552 60.563,20.552 61.617,21.606 61.617,21.612 D2.4 62.357,22.987 63.754,24.384 66.421,24.384 68.072,22.733 D1.1
DISP3: D1.2 D2.2 R8.2 | length 27.3
  Bottom Layer w0.8: R8.2 49.403,18.161 51.472,20.23 55.409,20.23 56.896,21.717 56.896,22.151 57.097,22.352 D2.2 57.277,23.114 60.041,25.878 67.721,25.878 70.612,22.987 D1.2
DISP4: D1.4 D2.1 R9.2 | length 31.4
  Bottom Layer w0.8: R9.2 49.537,21.343 49.918,21.343 50.927,22.352 D2.1 54.737,22.733 59.182,27.178 71.501,27.178 75.692,22.987 D1.4
DISP5: D1.7 D2.9 R10.2 | length 32.6
  Bottom Layer w0.8: R10.2@49.403,34.493 55.194,34.493 57.277,36.576 D2.9 57.277,39.116 58.853,40.692 66.181,40.692 66.263,40.61 66.706,40.61 66.788,40.692 74.116,40.692 75.692,39.116 D1.7
DISP6: D1.6 D2.10 R11.2 | length 34.4
  Bottom Layer w0.8: R11.2 54.559,37.77 D2.10 54.737,39.116 57.658,42.037 75.311,42.037 78.232,39.116 D1.6
e: P3.6 R9.1 U1.6 | length 6.3
  Bottom Layer w0.8: U1.6 P3.6 36.703,21.082 R9.1@39.243,21.082
f: P3.11 R10.1 U1.11 | length 6.4
  Bottom Layer w0.8: U1.11 P3.11 38.227,33.401 38.989,34.163 R10.1@39.243,34.163
g: P3.12 R11.1 U1.12 | length 6.6
  Bottom Layer w0.8: U1.12 P3.12 36.957,35.941 38.1,37.084 R11.1@39.243,37.084
GND: C1.1 C2.2 C3.2 C4.1 C5.1 C6.1 C7.1 D3.2 P1.1 P2.3 P3.8 P4.7 pad.2 pad.7 Q3.3 R12.1 R15.2 S1.3 S1.4 U1.8 U1.22 U2.2 | length 10
  Top Layer w0.8: pad.7@19.431,24.511 pad.7@19.431,34.544
MISO: P1.6 P4.11 U1.18 | length 17.7
  Bottom Layer w0.6: U1.18 25.908,33.401 28.787,36.28 28.787,39.641 28.786,39.642 28.786,39.86 28.787,39.861 28.787,44.408 P1.6
  Bottom Layer w0.8: P4.11 U1.18
MOSI: P1.3 P4.12 pad.3@27.813,50.292 pad.3@37.719,50.292 R4.2 U1.17 | length 42.7
  Top Layer w0.8: pad.3@27.813,50.292 37.719,50.292 pad.3@38.1,50.292
  Bottom Layer w0.6: U1.17@26.67,35.941 27.686,36.957 27.686,37.776 27.687,37.777 27.687,39.185 27.686,39.186 27.686,40.316 27.687,40.317 27.687,50.166 pad.3@27.813,50.292
  Bottom Layer w0.8: R4.2 17.78,38.608 20.447,35.941 P4.12 U1.17 U1.17@26.67,35.941 ; P1.3 32.639,48.266 34.665,50.292 37.719,50.292 pad.3@38.1,50.292
NetD1_3: D1.3 D1.8 Q1.1 | length 31.9
  Bottom Layer w0.8: D1.3 73.152,19.05 Q1.1 78.74,18.415 80.264,19.939 80.264,23.241 73.152,30.353 D1.8
NetD2_3: D2.3 D2.8 Q2.1 | length 76.3
  Bottom Layer w0.8: D2.3 59.817,21.844 56.903,18.93 53.06,18.93 49.9,15.77 47.901,15.77 46.355,14.224 ; D2.8 59.817,37.084 55.626,32.893 48.006,32.893 46.355,31.242 46.355,14.224 ; Q2.1 62.611,18.415 59.182,14.986 55.886,14.986 50.149,9.249 48.155,9.249 46.355,11.049 46.355,14.224
NetD3_1: D3.1 R4.1 | length 6.3
  Bottom Layer w0.8: D3.1 R4.1
NetD4_2: D4.2 R15.1 | length 3.9
  Bottom Layer w1: D4.2@31.068,55.951 R15.1@35.005,55.951
NetLS1_2: LS1.2 Q3.1 R14.1 | length 22.7
  Bottom Layer w0.8: R14.1@53.721,55.118 61.722,55.118 LS1.2 67.818,51.562 Q3.1
NetQ1_2: Q1.2 R1.2 | length 30
  Bottom Layer w0.8: R1.2 54.684,16.33 58.494,16.33 62.379,20.215 67.542,20.215 71.882,15.875 Q1.2
NetQ2_2: Q2.2 R2.2 | length 56.1
  Bottom Layer w0.8: R2.2 44.958,36.601 44.958,10.89 45.055,10.793 45.055,10.511 47.617,7.949 50.687,7.949 53.628,10.89 57.118,10.89 62.103,15.875 Q2.2
NetQ3_2: Q3.2 R16.2 | length 20.6
  Bottom Layer w0.8: R16.2 73.152,48.26 Q3.2
PB0: P3.14 U1.14 | length 3.2
  Bottom Layer w0.8: U1.14 P3.14
PC1: P4.5 U1.24 | length 3.3
  Bottom Layer w0.8: P4.5 U1.24
PC2: P4.4 U1.25 | length 3.3
  Bottom Layer w0.8: P4.4 U1.25
PC3: P4.3 U1.26 | length 3.3
  Bottom Layer w0.8: P4.3 U1.26
PC4: P4.2 U1.27 | length 3.3
  Bottom Layer w0.8: P4.2 U1.27
PC5: P4.1 U1.28 | length 3.3
  Bottom Layer w0.8: P4.1 U1.28
Pot: P4.6 R12.2 U1.23 | length 19.5
  Bottom Layer w0.8: R12.2@8.763,14.144 13.509,14.144 20.066,20.701 P4.6 U1.23
PPM: P2.1 P4.13 U1.16 | length 29.6
  Bottom Layer w0.8: P2.1 4.287,31.623 5.402,32.738 5.402,36.682 10.122,41.402 18.034,41.402 20.955,38.481 P4.13 U1.16
RESET: P1.2 P3.1 R3.1 U1.1 | length 52.7
  Bottom Layer w0.6: U1.1@32.113,8.001 30.987,9.127 30.987,11.245 30.988,11.246 30.988,12.376 30.987,12.377 30.987,13.785 30.988,13.786 30.988,14.916 30.987,14.917 30.987,16.325 30.988,16.326 30.988,17.456 30.987,17.457 30.987,18.865 30.988,18.866 30.988,19.996 30.987,19.997 30.987,21.405 30.988,21.406 30.988,22.536 30.987,22.537 30.987,23.945 30.988,23.946 30.988,25.076 30.987,25.077 30.987,26.485 30.988,26.486 30.988,27.616 30.987,27.617 30.987,29.025 30.988,29.026 30.988,30.156 30.987,30.157 30.987,31.565 30.988,31.566 30.988,32.696 30.987,32.697 30.987,34.105 30.988,34.106 30.988,35.236 30.987,35.237 30.987,36.645 30.988,36.646 30.988,37.776 30.987,37.777 30.987,41.725 32.083,42.821 38.376,42.821 39.116,43.561 R3.1@39.116,44.323
  Bottom Layer w0.8: U1.1@32.113,8.001 U1.1 P3.1 ; P1.2 37.846,45.72 R3.1
SCK: P1.4 P4.10 U1.19 | length 22.2
  Bottom Layer w0.6: U1.19 27.432,30.861 29.887,33.316 29.887,42.968 P1.4
  Bottom Layer w0.8: P4.10 U1.19
SEL1: P3.2 R1.1 U1.2 | length 5.1
  Bottom Layer w0.8: U1.2 P3.2 38.227,10.541
SEL2: P3.13 R2.1 U1.13 | length 6.4
  Bottom Layer w0.8: U1.13 P3.13 36.703,38.481 R2.1@38.735,40.513
Switch: C7.2 P3.4 R13.1 S1.1 S1.2 U1.4 | length 48.9
  Bottom Layer w0.8: U1.4 P3.4 36.703,16.002 40.132,16.002 41.783,14.351 41.783,7.912 44.615,5.08 C7.2 45.089,4.949 54.733,4.949 R13.1 57.658,7.874 68.707,7.874 70.576,6.005 S1.2 S1.2@70.501,5.588
VIN: C2.1 C5.2 LS1.1 P2.2 pad.1 R14.2 U2.1 | length 123.6
  Bottom Layer w1.2: 0.821,34.82 pad.1@3.067,37.065 ; P2.2@3.175,28.829 2.159,28.829 0.762,30.226 0.762,54.229 3.044,56.511 C2.1 4.187,56.511 6.985,59.309 13.843,59.309 ; pad.1 3.937,37.719 9.555,43.337 15.905,43.337 U2.1 ; C5.2 13.843,59.182 13.843,59.309 ; LS1.1 49.022,50.292 40.005,59.309 13.843,59.309
pads on no net: D1.5 D2.5

## Polygon pours and split planes (outlines as drawn)
GND on Bottom Layer "GND_L02_P032" (solid, pour order 32): 0,0 0,60.198 84.582,60.198 84.582,0
no net on Bottom Layer "NONET_L-01_P-001" (solid, remove dead copper, pour order 18): 74.803,1.778
no net on Bottom Layer "NONET_L02_P014" (solid, remove dead copper, pour order 14): 83.82,5.588
no net on Bottom Layer "NONET_L02_P012" (solid, remove dead copper, pour order 12): 83.82,5.588
no net on Bottom Layer "NONET_L02_P010" (solid, remove dead copper, pour order 10): 79.248,8.509
no net on Bottom Layer "NONET_L02_P006" (solid, remove dead copper, pour order 6): 82.042,11.557
no net on Bottom Layer "NONET_L02_P002" (solid, remove dead copper, pour order 2): 76.327,5.715
no net on Bottom Layer "Bottom Layer-No Net" (solid, pour order 22): 77.216,2.794
no net on Bottom Layer "Bottom Layer-No Net 1" (solid, pour order 24): 77.216,2.794
no net on Bottom Layer "Bottom Layer-No Net 2" (solid, pour order 26): 77.216,2.794

## Other copper
Bottom Layer:
  region net 3V3: 19.431,25.781
  region net 3V3: 19.431,25.781

## Text inside footprints (layer, text, board x,y; h text height)
C2: Mechanical 29 "-" at 2.437,54.141 h0.5 r270; Mechanical 29 "+" at 2.437,56.741 h0.5 r270; Top Overlay "-" at 2.437,54.141 h0.5 r270; Top Overlay "+" at 2.437,56.741 h0.5 r270
C3: Mechanical 29 "-" at 2.564,44.493 h0.5 r270; Mechanical 29 "+" at 2.564,47.093 h0.5 r270; Top Overlay "-" at 2.564,44.493 h0.5 r270; Top Overlay "+" at 2.564,47.093 h0.5 r270
D1: Mechanical 29 "1" at 69.052,20.972 h0.5
D2: Mechanical 29 "1" at 55.717,20.972 h0.5
D3: Mechanical 29 "A" at 11.684,36.195 h0.5 r90; Mechanical 29 "K" at 11.684,37.973 h0.5 r90
D4: Mechanical 29 "K" at 30.052,54.427 h0.5; Mechanical 29 "A" at 28.274,54.427 h0.5
LS1: Top Overlay "+" at 60.048,47.042 h1.5
P1: Mechanical 29 "1" at 34.163,49.276 h0.5 r180
P3: Mechanical 29 "1" at 37.465,9.017 h0.5 r90
P4: Mechanical 29 "1" at 23.368,9.017 h0.5 r90
Q1: Mechanical 29 "1" at 75.187,19.075 h0.5 r270
Q2: Mechanical 29 "1" at 65.789,19.075 h0.5 r270
Q3: Mechanical 29 "1" at 75.314,52.222 h0.5 r270
R1: Mechanical 29 "1" at 40.386,10.033 h0.5
R2: Mechanical 29 "1" at 40.386,40.03 h0.5
R3: Mechanical 29 "1" at 40.386,43.307 h0.5
R4: Mechanical 29 "1" at 17.51,34.938 h0.5 r90
R5: Mechanical 29 "1" at 40.386,29.972 h0.5
R6: Mechanical 29 "1" at 40.513,26.67 h0.5
R7: Mechanical 29 "1" at 40.386,12.954 h0.5
R8: Mechanical 29 "1" at 40.386,16.806 h0.5
R9: Mechanical 29 "1" at 40.386,20.193 h0.5
R10: Mechanical 29 "1" at 40.386,33.782 h0.5
R11: Mechanical 29 "1" at 40.386,36.754 h0.5
R13: Mechanical 29 "1" at 56.007,4.064 h0.5
R14: Mechanical 29 "1" at 52.578,56.388 h0.5 r180
R15: Mechanical 29 "1" at 34.256,54.951 h0.5
R16: Mechanical 29 "1" at 44.577,47.244 h0.5
U1: Mechanical 29 "1" at 31.437,7.911 h0.5 r90
U2: Mechanical 29 "1" at 19.174,54.446 h0.5 r270